# Altium PCB IPT_Secondary_Converter.PcbDoc
Units mm, origin at the board's own origin, x right, y up, seen from the top; angles counter-clockwise.
Board outline 57.15 x 60.96 mm, 2 copper layers (Top Layer, Bottom Layer); 45 components, 21 nets, 137 pads, 80 vias.
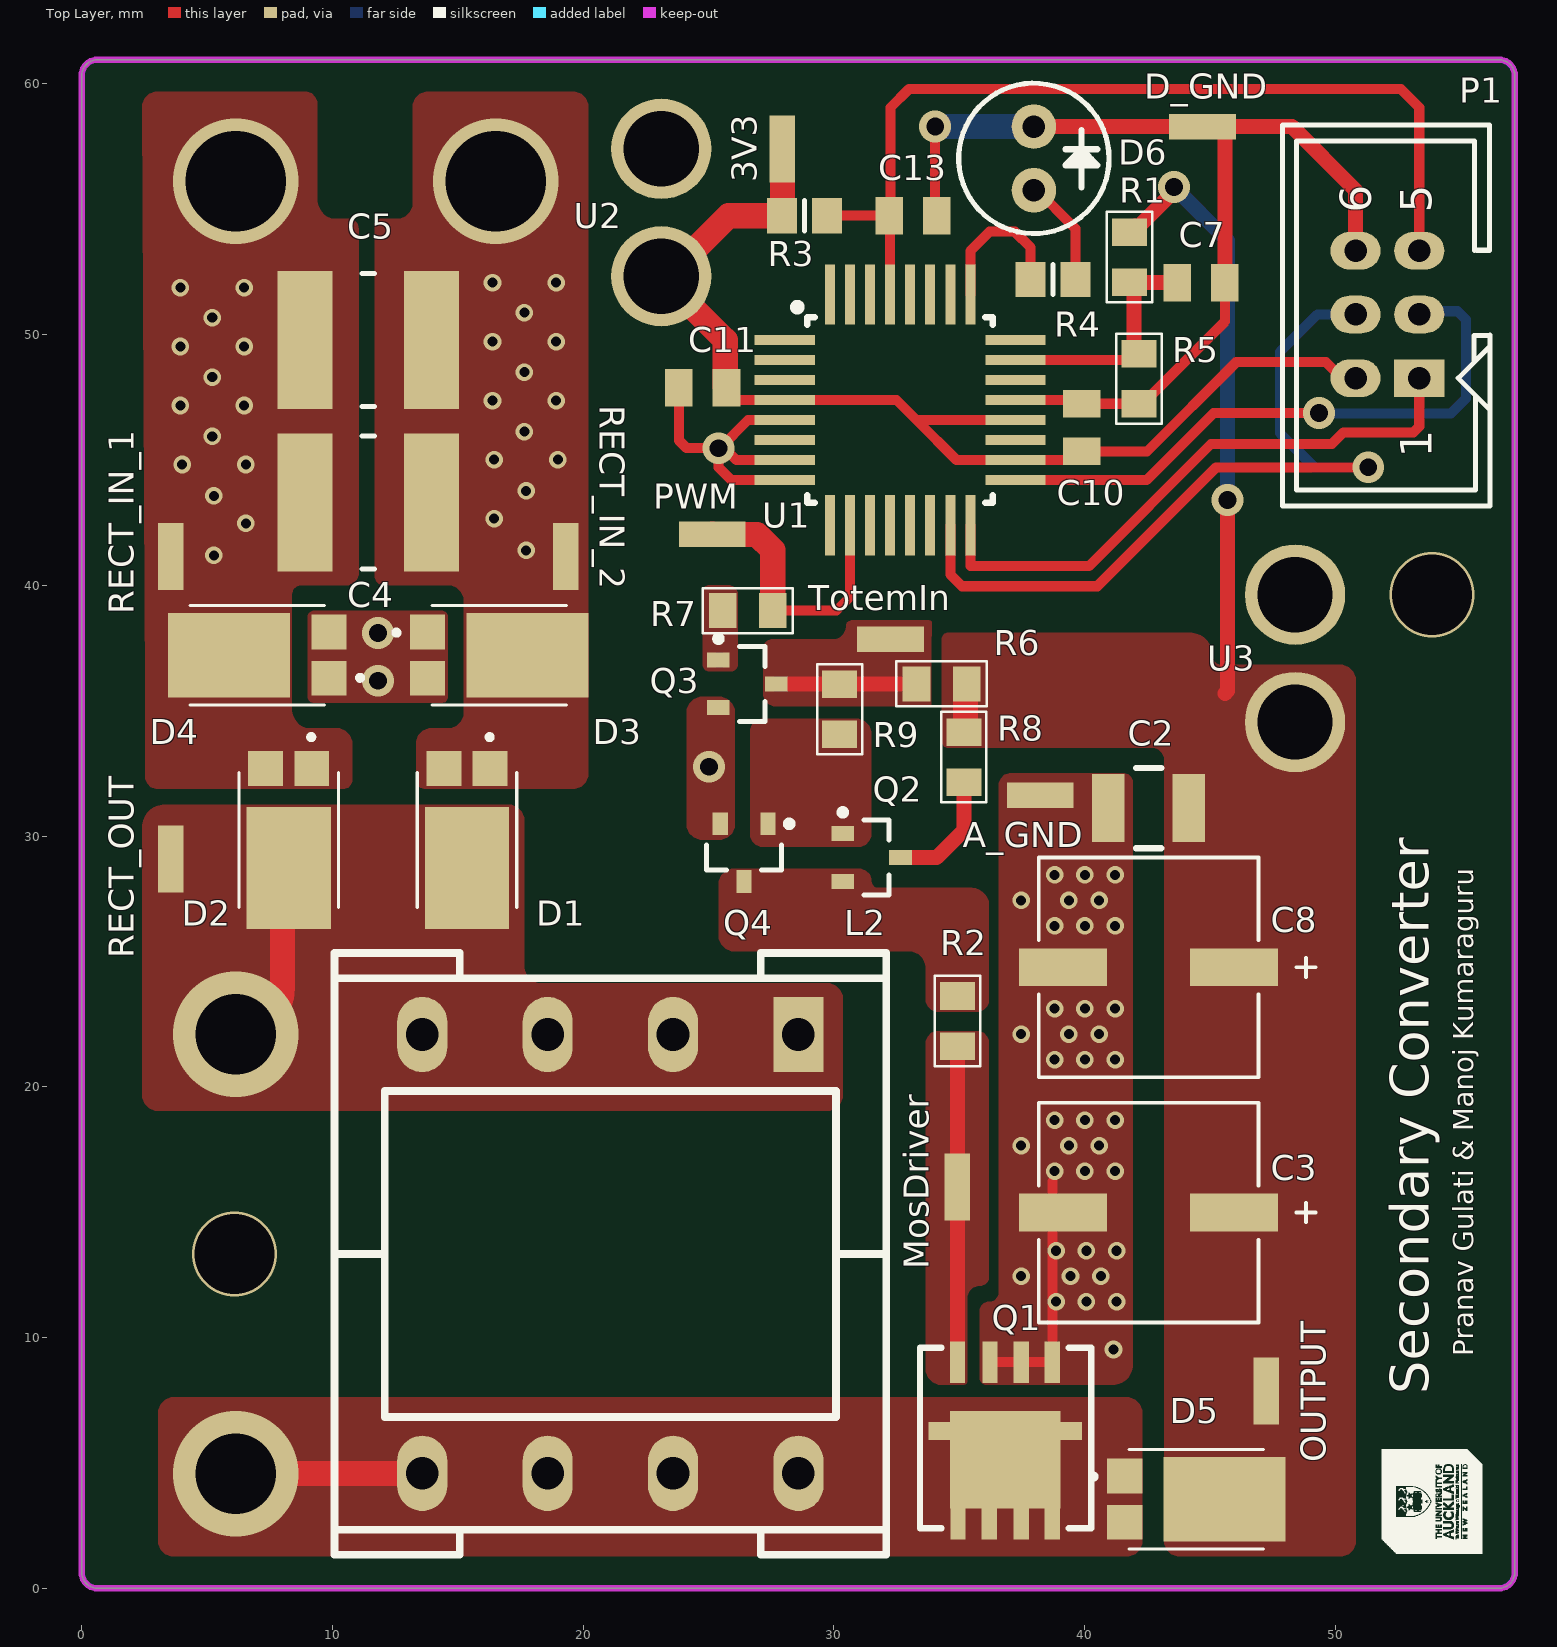
[diagram p0: Top Layer view]
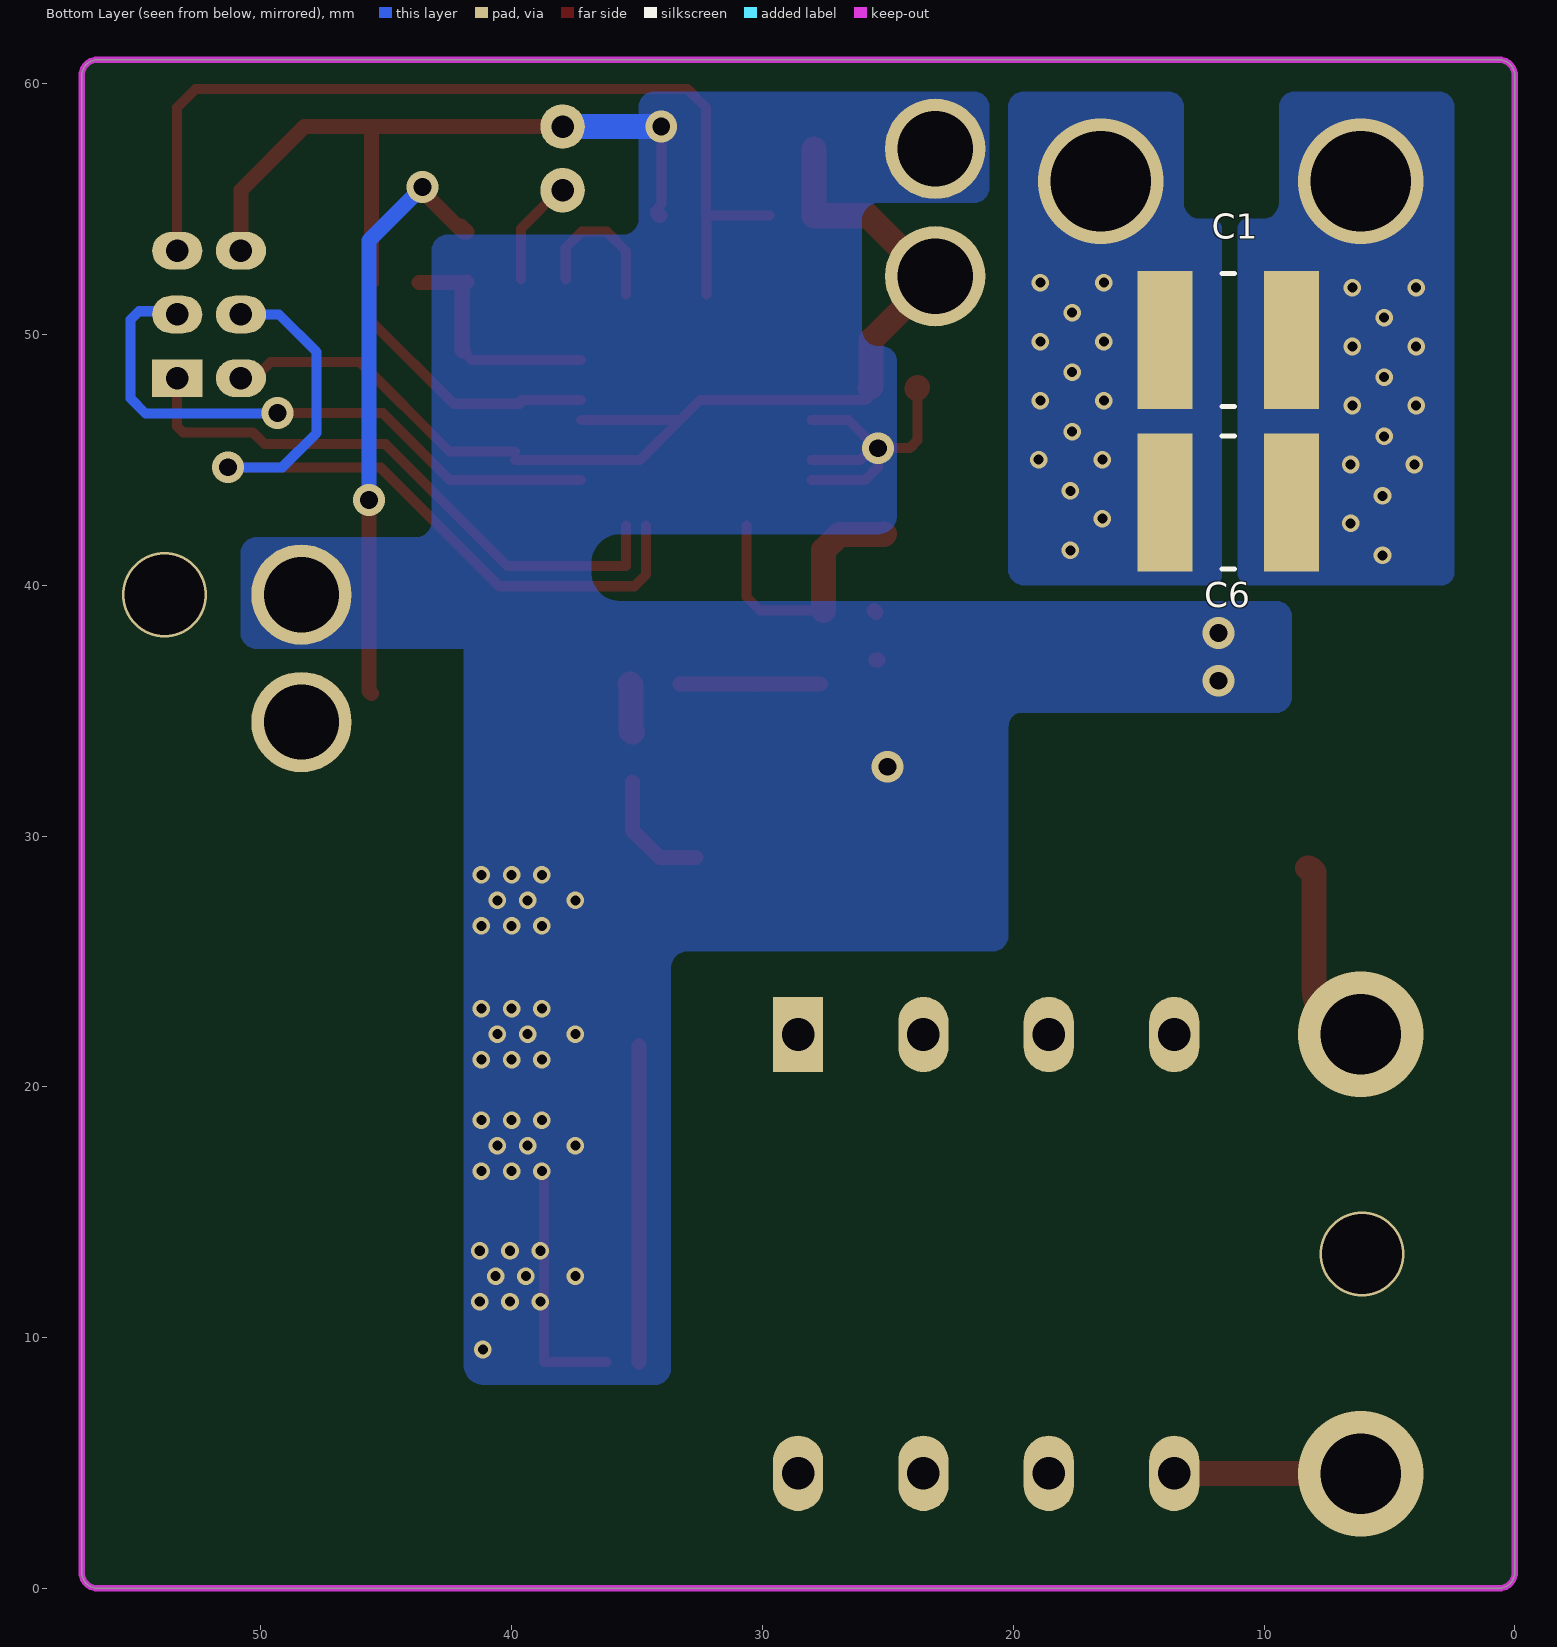
[diagram p1: Bottom Layer view, seen from below]

## Layer stack, top to bottom
Top Solder: solder mask 0.0102, Solder Resist, Dk 3.5
Top Layer: signal copper 0.0356
Dielectric 1: dielectric 0.32, FR-4, Dk 4.8
Bottom Layer: signal copper 0.0356
Bottom Solder: solder mask 0.0102, Solder Resist, Dk 3.5

## Board outline
0.635,0 cw(c0.635,0.635) 0,0.635 0,60.325 cw(c0.635,60.325) 0.635,60.96 56.515,60.96 cw(c56.515,60.325) 57.15,60.325 57.15,0.635 cw(c56.515,0.635) 56.515,0 ccw(c56.512,0) 56.512,0.003 54.229,0.003

## Design rules (kind name [scope] priority, off if disabled: settings)
BoardOutlineClearance [All] p1: gap=0.254 ignorepadtopadclearanceinfootprint=FALSE except(0: Arc-SplitContinuation Track-SplitContinuation SMDPad-SplitContinuation THPad-SplitContinuation Via-SplitContinuation Fill-SplitContinuation Poly-SplitContinuation Region-SplitContinuation Text-SplitContinuation)
Clearance [All] p1: gap=0.4 ignorepadtopadclearanceinfootprint=FALSE
Height [All] p1: minheight=0 maxheight=100 prefheight=12.7
HoleSize [All] p1: absolutevalues=TRUE maxlimit=10 minlimit=0.4 maxpercent=80.000 minpercent=20.000
PolygonConnect highPowerDirectConnect [InNet('Boost1')] p1: connectstyle=Direct reliefconductorwidth=0.254 reliefentries=4 polygonreliefangle="90 Angle" airgapwidth=0.254
PolygonConnect GND [InNet('GND')] p2: connectstyle=Direct reliefconductorwidth=0.254 reliefentries=4 polygonreliefangle="90 Angle" airgapwidth=0.254
PolygonConnect [All] p3: connectstyle=Relief reliefconductorwidth=0.5 reliefentries=4 polygonreliefangle="90 Angle" airgapwidth=0.5
RoutingVias [All] p1: holewidth=0.711 width=1.27 viastyle="Through Hole" minholewidth=0.711 minwidth=1.27 maxholewidth=0.711 maxwidth=1.27
SilkToSilkClearance [All] p1: silktosilkclearance=0.1
SilkToSolderMaskClearance [IsPad] p1: minsilkscreentomaskgap=0.1 clearancetoexposedcopper=TRUE
SolderMaskExpansion [All] p1: expansion=0.102 istentingtop=FALSE
Width [All] p1: maxlimit=10 minlimit=0.4 preferedwidth=1
26 further rules are at their usual default settings.

## Components (designator, comment, footprint, x,y, rotation, side; value= is the part's Value field where it differs from the comment)
3V3 "TP_DIR" TP5015 27.94,57.404 r90 top
A_GND "TP_GND" TP5015 38.227,31.623 r180 top
C1 "CCAP5750" C5750 11.43,49.784 r180 bottom
C2 "CER 10uF" C1210 42.545,31.115 r0 top
C3 "UCD1E221MNL1GS" PCAP_8x10-ELECT_NCA 42.545,14.986 r180 top
C4 "CCAP5750" C5750 11.43,43.307 r180 top
C5 "CCAP5750" C5750 11.43,49.784 r180 top
C6 "CCAP5750" C5750 11.43,43.307 r180 bottom
C7 "*" C0805 44.638,52.07 r180 top
C8 "UCD1E221MNL1GS" PCAP_8x10-ELECT_NCA 42.545,24.765 r180 top
C10 "100n" C0805 39.878,46.289 r270 top
C11 "100n" C0805 24.765,47.879 r0 top
C13 "18n0" C0805 33.147,54.737 r180 top
D1 "SDT5H100P5" DIO_PDS360-13 15.367,29.845 r180 top
D2 "SDT5H100P5" DIO_PDS360-13 8.255,29.845 r180 top
D3 "SDT5H100P5" DIO_PDS360-13 16.654,37.211 r270 top
D4 "SDT5H100P5" DIO_PDS360-13 7.002,37.211 r90 top
D5 "SDT5H100P5" DIO_PDS360-13 44.45,3.556 r270 top
D6 "Green" LED 37.973,57.023 r90 top
D_GND "TP_GND" TP5015 44.704,58.293 r0 top
L2 "Inductor" EFD20 21.082,13.335 r270 top
MosDriver "TP_DIR" TP5015 34.925,16.002 r270 top
OUTPUT "TP_DIR" TP5015 47.244,7.874 r90 top
P1 "HDR3X2" HDR2X3_2P54 53.34,48.26 r90 top
PWM "TP_DIR" TP5015 25.146,42.037 r180 top
Q1 "NMOS" BSC072N08NS5ATMA1_modified_v2 36.83,5.893 r180 top
Q2 "BC817" SOT95P230X110-3N 31.503,29.144 r0 top
Q3 "BC817" SOT95P230X110-3N 26.543,36.068 r0 top
Q4 "BC807" SOT95P230X110-3N 26.416,29.337 r270 top
R1 "*" "0805 RES" 41.783,53.086 r270 top
R2 "*" "0805 RES" 34.925,22.622 r270 top
R3 "18k0" R0805 28.829,54.737 r180 top
R4 "150R0" R0805 38.735,52.197 r180 top
R5 "*" "0805 RES" 42.164,48.239 r270 top
R6 "*" "0805 RES" 34.29,36.068 r180 top
R7 "*" "0805 RES" 26.559,38.989 r180 top
R8 "*" "0805 RES" 35.179,33.147 r90 top
R9 "*" "0805 RES" 30.226,35.052 r90 top
RECT_IN_1 "TP_DIR" TP5015 3.556,41.148 r90 top
RECT_IN_2 "TP_DIR" TP5015 19.304,41.148 r90 top
RECT_OUT "TP_TX" TP5015 3.556,29.083 r270 top
TotemIn "TP_GND" TP5015 32.258,37.846 r180 top
U1 "ATMega328PB" TQFP32 32.639,46.99 r0 top
U2 "2 PIN HEADER 3MM" 3mm_holes 23.114,54.864 r90 top
U3 "2 PIN HEADER 3MM" 3mm_holes 48.387,37.084 r90 top

## Footprints (in the part's own frame and the unit in brackets; to place one, negate y for a bottom-side part, rotate by r counter-clockwise, add the part's x,y. Pads: shape width x height; smd on the part's side, far side on the other; paste and mask are expansions set on the pad)
3mm_holes [mm]
  round 4 hole 3: 1(-2.54,0) 2(2.54,0)
"0805 RES" [mm] "http://www.digikey.co.nz/Web%20Export/Supplier%20Content/Vishay_8026/PDF/VishayBeyschlag_SolderPad.pdf?redirected=1 with dimension G modified by +0.25mm"
  rect 1.1x1.4 smd: 1(-1,0) 2(1,0)
  silkscreen extent -1.8,-0.9 1.8,0.9, body extent -1.04,-0.66 1.04,0.66, height 0.61
BSC072N08NS5ATMA1_modified_v2 [mil]
  rect 23.94x65 smd: 1(-74,-123) 1(-25,-123) 1(24,-123) 4(75,-123) 8(-74,123) 8(-25,123) 8(25,123) 8(74,123)
  rect 65x27.87 smd: 8(-88,-15) 8(88,-15)
  rect 173.62x153.54 smd: 8(0,30.26)
  silkscreen extent -135,-146 134,138, body extent -106,-127 107,127, height 40
C0805 [mm]
  rect 1.1x1.5 smd: 1(-0.95,0) 2(0.95,0)
  body extent -1.1,-0.72 1.1,0.72, height 1.1
C1210 [mm]
  rect 1.3x2.7 smd: 1(-1.6,0) 2(1.6,0)
  silkscreen extent -0.5,-1.6 0.5,1.6, body extent -1.8,-1.4 1.8,1.4, height 1.24
C5750 [mm] "C5750 footprint"
  rect 2.2x5.5 smd: 1(-2.525,0) 2(2.525,0)
  silkscreen extent -0.25,-2.65 0.25,2.65, body extent -3.05,-2.7 3.05,2.7, height 3.2
DIO_PDS360-13 [mm]
  rect 1.39x1.4 smd: 1(-0.92,-2.856) 2(0.92,-2.856)
  rect 3.36x4.86 smd paste-3: 3(0,1.126)
  silkscreen extent -1.98,-4.2 1.98,2.69
EFD20 [mm]
  rect 3x2 hole 1.3: 1(-8.75,7.5)
  oval 3x2 hole 1.3: 2(-8.75,2.5) 3(-8.75,-2.5) 4(-8.75,-7.5) 5(8.75,-7.5) 6(8.75,-2.5) 7(8.75,2.5) 8(8.75,7.5)
  silkscreen extent -12,-11 12,11
HDR2X3_2P54 [mm] "IDC 3X2 Way 2.54 pitch"
  rect 1.5x2 hole 0.9: 1(0,0)
  oval 1.5x2 hole 0.9 paste+0: 2(0,2.54)
  oval 1.5x2 hole 0.9: 3(2.54,0) 4(2.54,2.54) 5(5.08,0) 6(5.08,2.54)
  silkscreen extent -5.1,-2.82 10.1,5.45, body extent -5.07,-3.17 10.17,6.28, height 9.1
LED [mil]
  round 70 hole 35.43: 1(-50,0) 2(50,0)
  silkscreen extent -118,-118 118,118, body extent -98,-98 98,98, height 413
PCAP_8x10-ELECT_NCA [mil]
  rect 138x59 smd paste+0 mask+0: 1(-134,0) 2(134,0)
  silkscreen extent -262,-173 173,173, body extent 0,0 10,10, height 10
R0805 [mm]
  rect 1.2x1.4 smd: 1(-0.9,0) 2(0.9,0)
  silkscreen extent 0,-0.6 0,0.6, body extent -1.07,-0.7 1.07,0.7, height 0.65
SOT95P230X110-3N [mm] "SOT23, 3-Leads, Body 2.90x2.30mm, Pitch 0.95mm, IPC Medium Density"
  rect 0.9x0.6 smd: 1(-1.15,0.95) 2(-1.15,-0.95) 3(1.15,0)
  silkscreen extent -1.27,-1.5 0.7,1.92, body extent -0.7,-1.5 0.7,1.5, height 1.1
TP5015 [mil]
  rect 105x40 smd: 1(0,0)
  body extent -51,-20 51,19, height 59
TQFP32 [mm]
  rect 2.4x0.4 smd: 1(-4.6,2.8) 2(-4.6,2) 3(-4.6,1.2) 4(-4.6,0.4) 5(-4.6,-0.4) 6(-4.6,-1.2) 7(-4.6,-2) 8(-4.6,-2.8) 17(4.6,-2.8) 18(4.6,-2) 19(4.6,-1.2) 20(4.6,-0.4) 21(4.6,0.4) 22(4.6,1.2) 23(4.6,2) 24(4.6,2.8)
  rect 0.4x2.4 smd: 9(-2.8,-4.6) 10(-2,-4.6) 11(-1.2,-4.6) 12(-0.4,-4.6) 13(0.4,-4.6) 14(1.2,-4.6) 15(2,-4.6) 16(2.8,-4.6) 25(2.8,4.6) 26(2,4.6) 27(1.2,4.6) 28(0.4,4.6) 29(-0.4,4.6) 30(-1.2,4.6) 31(-2,4.6) 32(-2.8,4.6)
  silkscreen extent -4.24,-3.7 3.7,4.24, body extent -3.5,-3.5 3.5,3.5, height 1.3

## Part data
3V3 A_GND D_GND MosDriver OUTPUT PWM RECT_IN_1 RECT_IN_2 RECT_OUT TotemIn: library part TP_5015, "SM Test Point 5015"
C1 C4 C5: "CCAP1210"
C2: library part CCAP1210, "Ceramic, 10uF"
C3 C8: "220µF 25V Aluminum Electrolytic Capacitors Radial, Can - SMD 5000 Hrs @ 105°C", Built_By=EMA_UL_Team, Copyright="Copyright (C) 2018 Accelerated Designs. All rights reserved", Manufacturer_Part_Number=UCD1E221MNL1GS, RefDes=RefDes, SourceLibrary=Nichicon_2011-10-21, Type=DEV, Vendor=Nichicon
C6: "https://product.tdk.com/info/en/documents/chara_sheet/C5750X7R2E474K230KM.pdf"
C7 C10 C11 C13: library part CCAP0805, "CCAP0805"
D1 D2 D3 D4 D5: library part SDT5H100P5-7DICT-ND
D6: library part LED_TH_2P54, "Typical throughole GaAs LED with 2.54mm pitch", Manufacturer="Generic Components", Class I=Optoelectronic, Class II=LED, Published=8-Jun-2000, Publisher="Altium Limited", Revision="July-2002: Re-released for DXP Platform."
L2: library part "Inductor EFD20", "Inductor with core"
P1: "Header, 3-Pin, Dual row"
Q1: library part "NMOS OptiMOS BSC072N08NS5ATMA1", "MOSFET N-CH 80V 74A 8TDSON", Manufacturer="Infineon Technologies", MPN=BSC072N08NS5ATMA1, Supplier Part Number 1=2725812, Part Description="MOSFET N-CH 80V 74A 8TDSON", Supplier 1=Element14, Supplier 2=Digi-Key, Supplier 3=Mouser, Supplier Part Number 2=BSC072N08NS5ATMA1CT-ND, Supplier Part Number 3=726-BSC072N08NS5ATMA, Type="Surface mount"
Q2 Q3: "BC817-40,215. NPN GP 500 45V SOT23", ComponentLink1Description=Datasheet, ComponentLink1URL=https://share.engineering.auckland.ac.nz/ece/ts/Student%20Documents/BC817_BC817W_BC337.pdf
Q4: "BC807-40,215.  PNP GP 500MA 45V SOT23", ComponentLink1Description=Datasheet, ComponentLink1URL=https://share.engineering.auckland.ac.nz/ece/ts/Student%20Documents/BC807_BC807W_BC327.pdf
R1 R2 R5 R6 R7 R8 R9: library part Res_SMT_0805, "0805 resistor", ComponentLink1Description=https://nz.mouser.com/datasheet/2/315/AOA0000C304-1149620.pdf, LatestRevisionDate=17-Jul-2002, LatestRevisionNote="Re-released for DXP Platform.", PackageReference=AXIAL-0.4, Published=8-Jun-2000, Publisher="Altium Limited"
R3 R4: library part RES0805, "RES0805"
U1: "IC MCU 8BIT 32KB FLASH 32TQFP", Supplier Part Number 1=ATMEGA328PB-AU-ND, Supplier 1=Digi-Key, Supplier 2=Digikey, Supplier Part Number 2=ATMEGA328PB-AU-ND
U2 U3: library part HEADER_2PIN, "3MM HOLES"

## Via types
v1: diameter 0.7, hole 0.4, Top Layer to Bottom Layer, 65 vias
v2: diameter 1.27, hole 0.711, Top Layer to Bottom Layer, 9 vias
v3: diameter 3.4, hole 3.2, Top Layer to Bottom Layer, 2 vias
v4: diameter 5, hole 3.2, Top Layer to Bottom Layer, 2 vias
v5: diameter 5, hole 4, Top Layer to Bottom Layer, 2 vias

## Nets (pads, with @x,y where several pads share a name; then routed paths per layer and width w, separated by ;. In a path a pad name is that pad's centre, name@x,y a point inside that pad or via, vN(x,y) a via of type N, cw(c..) or ccw(c..) an arc to the next point about the centre after c; other vN are vias at no path point)
3V3: 3V3.1 C10.2 C11.2 P1.2 R3.2 U1.4 U1.18 U1.20 U2.1 | length 46
  Top Layer w0.4: C11.2@25.715,47.625 ccw(c25.95,47.625) 25.95,47.39 U1.4 32.493,47.39 33.293,46.59 ; U1.20 33.293,46.59 ; C10.2@39.878,44.99 U1.18 34.893,44.99 33.293,46.59 ; C10.2 42.484,45.339 46.04,48.895 49.617,48.895 50.252,48.26 P1.2 P1.2@50.59,48.47
  Top Layer w1: U2.1 23.384,52.324 25.797,54.737 R3.2 27.94,54.737 3V3.1 ; U2.1@23.241,52.197 25.665,49.773 25.665,47.929 C11.2
Boost1: D1.3 D2.3 L2.1 L2.2 L2.3 L2.4 RECT_OUT.1 | length 7.8
  Top Layer w1: v4(6.143,22.098) ccw(c6.143,23.956) 8.001,23.956 8.001,28.465 cw(c8.255,28.465) D2.3
Debug: R4.2 U1.25 | length 6
  Top Layer w0.4: U1.25 35.439,53.334 36.207,54.102 37.211,54.102 37.846,53.467 37.846,52.208 R4.2
GND: A_GND.1 C2.1 C3.2 C7.1 C8.2 C10.1 C11.1 C13.1 D3.1 D3.2 D4.1 D4.2 D6.2 D_GND.1 P1.6 Q1.1 Q3.2 Q4.2 R5.2 U1.5 U1.7 U1.8 U1.21 U2.2 U3.2 | length 64.9
  Top Layer w0.4: C11.1 23.815,45.781 24.13,45.466 v2(25.4,45.466) ; U1.8 25.914,44.19 25.4,44.704 v2(25.4,45.466) ; U1.7 26.111,44.99 25.635,45.466 v2@25.451,45.466 ; U1.5 26.575,46.59 v2@25.451,45.466 ; v2(34.036,58.293) 34.036,55.184 34.29,54.93 C13.1@34.163,54.803 ; Q1.1@36.22,9.017 37.465,9.017 38.71,9.017 38.71,16.217 ; U1.21 C10.1@39.624,47.39 ; C10.1@39.678,47.239 C10.1 R5.2 42.314,47.239 45.588,50.513 C7.1 ; v2(25.4,45.466) v2@25.451,45.466
  Top Layer w0.6: C13.1 C13.1@34.163,54.803 ; D6.2 43.17,58.293 D_GND.1 D_GND.1@45.38,58.293 ; C7.1 45.588,58.085 D_GND.1@45.38,58.293 ; P1.6@50.482,53.34 P1.6 50.8,55.753 48.26,58.293 D_GND.1@45.38,58.293
  Top Layer w1: C11.1 C11.1@23.845,47.848
  Bottom Layer w1: v2(34.036,58.293) D6.2
  other v1: 41.148,9.525 38.862,11.43 40.069,11.43 41.275,11.43 37.465,12.446 39.433,12.446 40.64,12.446 38.862,13.462 40.069,13.462 41.275,13.462 38.798,16.637 40.005,16.637 41.212,16.637 37.465,17.653 39.37,17.653 40.576,17.653 38.798,18.669 40.005,18.669 41.212,18.669 38.798,21.082 40.005,21.082 41.212,21.082 37.465,22.098 39.37,22.098 40.576,22.098 38.798,23.114 40.005,23.114 41.212,23.114 38.798,26.416 40.005,26.416 41.212,26.416 37.465,27.432 39.37,27.432 40.576,27.432 38.798,28.448 40.005,28.448 41.212,28.448
  other v2: 25.019,32.766 11.811,36.195 11.811,38.1
L_st1: C1.2 C4.2 C5.2 C6.2 D2.1 D2.2 D4.3 RECT_IN_1.1
  other v1: 5.275,41.195 6.545,42.465 5.275,43.564 4.005,44.817 6.545,44.817 5.207,45.934 3.937,47.169 6.477,47.169 5.207,48.303 3.937,49.521 6.477,49.521 5.207,50.673 3.937,51.873 6.477,51.873
  other v5: 6.143,56.11
L_st2: C1.1 C4.1 C5.1 C6.1 D1.1 D1.2 D3.3 RECT_IN_2.1
  other v1: 17.721,41.392 16.451,42.662 17.721,43.761 16.451,45.014 18.991,45.014 17.653,46.131 16.383,47.366 18.923,47.366 17.653,48.5 16.383,49.718 18.923,49.718 17.653,50.87 16.383,52.07 18.923,52.07
  other v5: 16.51,56.11
MISO: P1.1 U1.16 | length 23.8
  Top Layer w0.4: U1.16 35.439,40.761 40.169,40.761 45.039,45.631 49.853,45.631 50.323,46.101 53.106,46.101 53.34,46.335 P1.1
MosDriver: MosDriver.1 Q1.4 R2.2 | length 12.6
  Top Layer w0.6: Q1.4 34.925,15.748 R2.2
MOSI: P1.4 U1.15 | length 31.7
  Top Layer w0.4: U1.15 34.639,40.43 35.108,39.961 40.5,39.961 45.243,44.704 v2(51.308,44.704)
  Bottom Layer w0.4: P1.4 49.276,50.8 47.787,49.311 47.787,46.066 49.149,44.704 v2(51.308,44.704)
NetD5_1: D5.1 D5.2 L2.5 L2.6 L2.7 L2.8 Q1.8 | length 7.5
  Top Layer w1: v4(6.143,4.572) 13.582,4.572 L2.5
NetD6_1: D6.1 R4.1 | length 4.4
  Top Layer w0.4: D6.1@37.973,55.88 39.635,54.218 R4.1
NetQ2_1: Q2.1 Q4.1 R9.1
NetQ2_2: Q2.2 Q4.3 R2.1
NetQ2_3: Q2.3 R8.1 | length 4.9
  Top Layer w0.6: Q2.3 34.097,29.144 35.179,30.226 R8.1
NetQ3_1: Q3.1 R7.2 | length 0.2
  Top Layer w0.6: Q3.1 Q3.1@25.476,37.018 ; R7.2@25.476,38.906 R7.2
PWM: PWM.1 R7.1 U1.10 | length 11.3
  Top Layer w0.4: R7.1 30.099,38.989 30.639,39.529 U1.10
  Top Layer w1: PWM.1 25.154,42.029 26.932,42.029 27.559,41.402 R7.1
RESET: C13.2 P1.5 R3.1 U1.29 | length 37.4
  Top Layer w0.4: R3.1 C13.2 ; U1.29 32.239,54.718 32.22,54.737 C13.2 ; P1.5 53.34,59.055 52.613,59.782 32.985,59.782 32.258,59.055 32.258,54.798 C13.2
SCK: P1.3 U1.17 | length 24.9
  Top Layer w0.4: U1.17 38.878,44.19 38.879,44.189 42.466,44.189 45.143,46.866 v2(49.342,46.866)
  Bottom Layer w0.4: v2(49.342,46.866) 49.342,47.129 49.403,47.19 49.74,46.854 54.601,46.854 55.197,47.45 55.197,50.594 54.864,50.927 53.467,50.927 P1.3
TotemIn: Q3.3 R6.2 R9.2 TotemIn.1 | length 5.6
  Top Layer w0.6: Q3.3 30.21,36.068 R9.2 30.234,36.06 33.282,36.06 R6.2
V_ADC: C7.2 R1.2 R5.1 U1.23 | length 9.6
  Top Layer w0.4: U1.23 41.601,48.99 R5.1@41.93,49.319
  Top Layer w0.6: R1.2 R1.2@41.791,52.078 ; R5.1@41.93,49.319 41.974,49.362 41.974,51.895 R1.2@41.791,52.078 ; C7.2 43.68,52.078 R1.2@41.791,52.078
Vdc_reg1: C2.2 C3.1 C8.1 D5.3 OUTPUT.1 R1.1 R6.1 R8.2 U3.1 | length 26.2
  Top Layer w0.6: R1.1@42.033,54.336 R1.1 41.933,54.086 43.561,55.714 v2(43.561,55.88) v2@43.457,55.776 ; 45.593,35.687 45.687,35.781 v2(45.687,43.401)
  Top Layer w1: R8.2 35.19,34.147 35.24,34.197 35.24,36.018 R6.1
  Bottom Layer w0.6: v2(43.561,55.88) 45.687,53.754 v2(45.687,43.401)
pads on no net: U1.1 U1.2 U1.3 U1.6 U1.9 U1.11 U1.12 U1.13 U1.14 U1.19 U1.22 U1.24 U1.26 U1.27 U1.28 U1.30 U1.31 U1.32
copper on no net:
  other v3: 6.096,13.335 53.848,39.624

## Polygon pours and split planes (outlines as drawn)
TotemIn on Top Layer "TOTEMIN_L01_P048" (solid, pour order 48): 33.782,35.179 ccw(c33.782,35.306) 33.909,35.306 33.909,38.481 ccw(c33.782,38.481) 33.782,38.608 30.734,38.608 ccw(c30.734,38.354) 30.48,38.354 cw(c29.972,38.354) 29.972,37.846 28.575,37.846 27.559,37.846 ccw(c27.559,37.465) 27.178,37.465 27.178,35.687 ccw(c27.686,35.687) 27.686,35.179
GND on Top Layer "GND_L01_P046" (solid, pour order 46): 25.4,29.845 ccw(c25.4,30.48) 26.035,30.48 26.035,34.925 ccw(c25.4,34.925) 25.4,35.56 24.765,35.56 ccw(c24.765,34.925) 24.13,34.925 24.13,30.48 ccw(c24.765,30.48) 24.765,29.845
NetQ3_1 on Top Layer "NETQ3_1_L01_P045" (solid, pour order 45): 26.162,39.624 ccw(c25.781,39.624) 25.781,40.005 25.019,40.005 ccw(c25.019,39.751) 24.765,39.751 24.765,36.83 ccw(c25.019,36.83) 25.019,36.576 25.908,36.576 ccw(c25.908,36.83) 26.162,36.83
NetQ2_1 on Top Layer "NetQ2_1" (solid, pour order 44): 27.178,34.671 ccw(c27.178,34.163) 26.67,34.163 26.67,30.059 ccw(c27.151,30.059) 27.151,29.578 30.975,29.578 ccw(c30.975,30.099) 31.496,30.099 31.496,34.036 ccw(c30.861,34.036) 30.861,34.671
NetQ2_2 on Top Layer "NetQ2_2" (solid, pour order 43): 35.433,27.94 cw(c35.433,27.178) 36.195,27.178 36.195,23.495 cw(c35.687,23.495) 35.687,22.987 34.163,22.987 cw(c34.163,23.495) 33.655,23.495 33.655,24.765 ccw(c33.02,24.765) 33.02,25.4 26.035,25.4 cw(c26.035,26.035) 25.4,26.035 25.4,28.067 cw(c26.035,28.067) 26.035,28.702 30.988,28.702 cw(c30.988,28.194) 31.496,28.194 ccw(c31.75,28.194) 31.75,27.94
Vdc_reg1 on Top Layer "Vout" (solid, pour order 35): 50.8,36.195 ccw(c50.165,36.195) 50.165,36.83 46.101,36.83 45.466,36.83 cw(c45.466,37.211) 45.085,37.211 ccw(c44.196,37.211) 44.196,38.1 34.544,38.1 ccw(c34.544,37.846) 34.29,37.846 34.29,33.782 ccw(c34.544,33.782) 34.544,33.528 42.672,33.528 cw(c42.672,33.02) 43.18,33.02 43.18,1.905 ccw(c43.815,1.905) 43.815,1.27 50.165,1.27 ccw(c50.165,1.905) 50.8,1.905
GND on Top Layer "GND" (solid, pour order 27): 36.576,32.004 cw(c37.084,32.004) 37.084,32.512 41.529,32.512 cw(c41.529,32.131) 41.91,32.131 41.91,8.89 cw(c41.148,8.89) 41.148,8.128 36.068,8.128 cw(c36.068,8.382) 35.814,8.382 35.814,11.049 cw(c36.195,11.049) 36.195,11.43 ccw(c36.195,11.811) 36.576,11.811
GND on Top Layer "GND_L01_P042" (solid, pour order 42): 9.017,38.735 cw(c9.271,38.735) 9.271,38.989 14.351,38.989 cw(c14.351,38.735) 14.605,38.735 14.605,35.56 cw(c14.351,35.56) 14.351,35.306 9.271,35.306 cw(c9.271,35.56) 9.017,35.56
L_st2 on Top Layer "L_ST2_L01_P041" (solid, pour order 41): 20.193,59.055 ccw(c19.558,59.055) 19.558,59.69 13.843,59.69 ccw(c13.843,59.055) 13.208,59.055 13.208,55.245 cw(c12.573,55.245) 12.573,54.61 11.938,54.61 ccw(c11.938,54.356) 11.684,54.356 11.684,40.386 ccw(c12.065,40.386) 12.065,40.005 14.605,40.005 cw(c14.605,39.37) 15.24,39.37 15.24,34.925 cw(c14.605,34.925) 14.605,34.29 13.97,34.29 ccw(c13.97,33.655) 13.335,33.655 13.335,32.258 ccw(c13.716,32.258) 13.716,31.877 19.558,31.877 ccw(c19.558,32.512) 20.193,32.512
L_st1 on Top Layer "L_ST1_L01_P040" (solid, pour order 40): 8.382,36.195 8.382,35.052 ccw(c9.144,35.052) 9.144,34.29 10.16,34.29 cw(c10.16,33.655) 10.795,33.655 10.795,32.258 cw(c10.414,32.258) 10.414,31.877 3.048,31.877 cw(c3.048,32.385) 2.54,32.385 2.529,35.814 2.413,59.055 cw(c3.048,59.055) 3.048,59.69 8.89,59.69 cw(c8.89,59.182) 9.398,59.182 9.398,55.372 ccw(c10.16,55.372) 10.16,54.61 10.647,54.61 cw(c10.647,54.203) 11.054,54.203 11.054,40.64 11.049,40.64 11.049,40.513 cw(c10.541,40.513) 10.541,40.005 8.763,40.005 ccw(c8.763,39.624) 8.382,39.624
Boost1 on Top Layer "BOOST1_L01_P018" (solid, pour order 18): 17.653,30.607 ccw(c17.018,30.607) 17.018,31.242 3.302,31.242 ccw(c3.302,30.353) 2.413,30.353 2.413,19.685 ccw(c3.048,19.685) 3.048,19.05 29.718,19.05 ccw(c29.718,19.685) 30.353,19.685 30.353,23.495 ccw(c29.718,23.495) 29.718,24.13 18.288,24.13 cw(c18.288,24.765) 17.653,24.765
MosDriver on Top Layer "MosDriver" (solid, pour order 30): 35.306,8.255 cw(c35.179,8.255) 35.179,8.128 34.29,8.128 cw(c34.29,8.763) 33.655,8.763 33.655,21.717 cw(c34.163,21.717) 34.163,22.225 35.687,22.225 cw(c35.687,21.717) 36.195,21.717 36.195,12.446 cw(c35.814,12.446) 35.814,12.065 ccw(c35.814,11.557) 35.306,11.557
NetD5_1 on Top Layer "NETD5_1_L01_P019" (solid, pour order 19): 41.656,7.62 cw(c41.656,6.985) 42.291,6.985 42.291,1.905 cw(c41.656,1.905) 41.656,1.27 3.683,1.27 cw(c3.683,1.905) 3.048,1.905 3.048,6.985 cw(c3.683,6.985) 3.683,7.62
GND on Bottom Layer (solid, pour order 52): 43.18,53.34 ccw(c42.545,53.34) 42.545,53.975 35.56,53.975 cw(c35.56,54.61) 34.925,54.61 34.925,59.055 ccw(c34.29,59.055) 34.29,59.69 21.59,59.69 ccw(c21.59,59.055) 20.955,59.055 20.955,55.88 ccw(c21.59,55.88) 21.59,55.245 25.4,55.245 cw(c25.4,54.61) 26.035,54.61 26.035,50.165 cw(c25.4,50.165) 25.4,49.53 25.273,49.53 ccw(c25.273,48.895) 24.638,48.895 24.638,42.799 ccw(c25.4,42.799) 25.4,42.037 35.56,42.037 35.687,42.037 cw(c35.687,40.894) 36.83,40.894 36.83,40.513 cw(c35.687,40.513) 35.687,39.37 9.525,39.37 ccw(c9.525,38.735) 8.89,38.735 8.89,35.56 ccw(c9.525,35.56) 9.525,34.925 19.685,34.925 cw(c19.685,34.426) 20.184,34.426 20.184,34.346 20.193,34.346 20.193,26.035 ccw(c20.828,26.035) 20.828,25.4 33.02,25.4 cw(c33.02,24.765) 33.655,24.765 33.655,8.763 ccw(c34.29,8.763) 34.29,8.128 41.148,8.128 ccw(c41.148,8.89) 41.91,8.89 41.91,37.465 50.165,37.465 ccw(c50.165,38.1) 50.8,38.1 50.8,41.275 ccw(c50.165,41.275) 50.165,41.91 43.815,41.91 cw(c43.815,42.545) 43.18,42.545
L_st2 on Bottom Layer "L_st2B" (solid, pour order 24): 20.193,40.64 cw(c19.558,40.64) 19.558,40.005 12.065,40.005 cw(c12.065,40.386) 11.684,40.386 11.684,54.229 cw(c12.065,54.229) 12.065,54.61 12.573,54.61 ccw(c12.573,55.245) 13.208,55.245 13.208,59.055 cw(c13.843,59.055) 13.843,59.69 19.558,59.69 cw(c19.558,59.055) 20.193,59.055
L_st1 on Bottom Layer "L_st1B" (solid, pour order 23): 2.413,40.513 ccw(c2.921,40.513) 2.921,40.005 10.541,40.005 ccw(c10.541,40.513) 11.049,40.513 11.049,54.229 ccw(c10.668,54.229) 10.668,54.61 10.033,54.61 cw(c10.033,55.245) 9.398,55.245 9.398,59.055 ccw(c8.763,59.055) 8.763,59.69 3.048,59.69 ccw(c3.048,59.055) 2.413,59.055

## Keep-outs
Keep-Out Layer:
  lines w0.254: 56.512,0 ccw(c56.51,0) 56.51,0.003 54.229,0.003 0.635,0 cw(c0.635,0.635) 0,0.635 0,60.325 cw(c0.635,60.325) 0.635,60.96 56.515,60.96 cw(c56.515,60.325) 57.15,60.325 57.15,0.635 cw(c56.515,0.635) 56.515,0 ccw(c56.512,0) 56.512,0.003

## Silkscreen, mask and mechanical layers (free items; w line width, h text height)
Top Overlay:
  drawing of 24 lines, arcs and shapes, not listed
  text "Pranav Gulati & Manoj Kumaraguru" at 55.486,9.25 h0.8 r90
  text "Secondary Converter" at 53.721,7.747 h1.52 r90

## Text inside footprints (layer, text, board x,y; h text height)
P1: Top Overlay "1" at 53.848,45.085 h1.27 r90; Top Overlay "5" at 53.848,54.864 h1.27 r90; Top Overlay "6" at 51.435,54.864 h1.27 r90